# Altium PCB MH-CD42_v1.pcbdoc
Units mm, origin at the board's own origin, x right, y up, seen from the top; angles counter-clockwise.
Board outline 29.9 x 51.08 mm, 2 copper layers (Top Layer, Bottom Layer); 17 components, 12 nets, 58 pads, 30 vias.
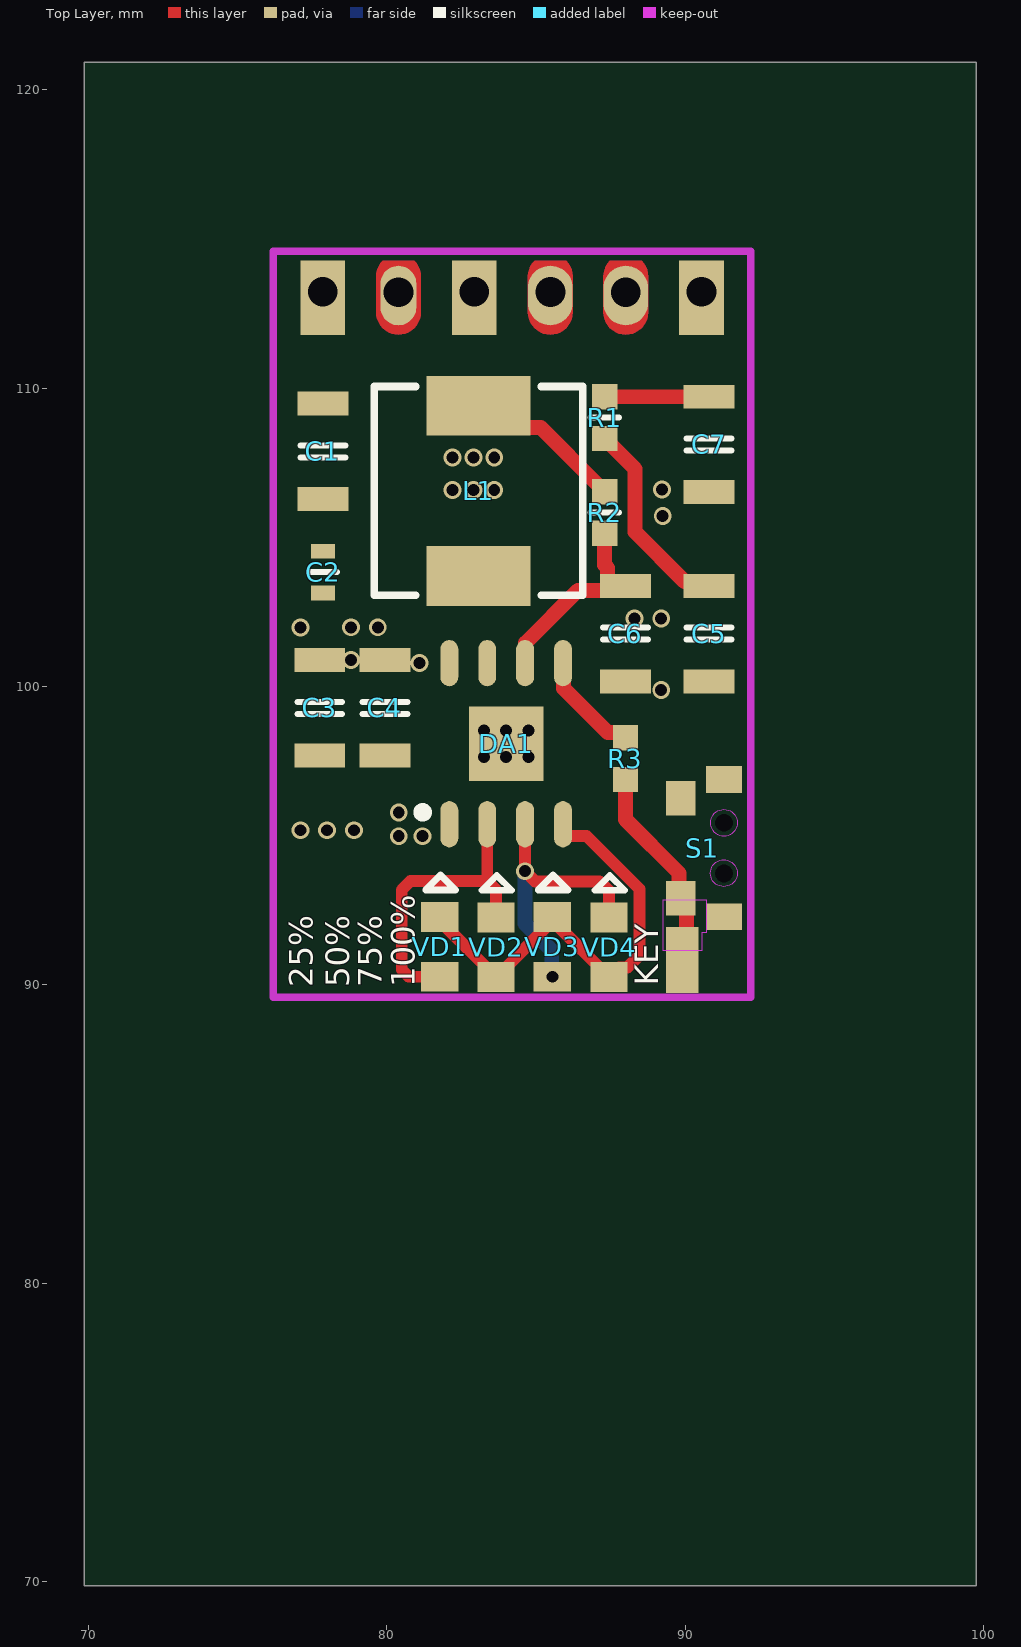
[diagram p0: Top Layer view]
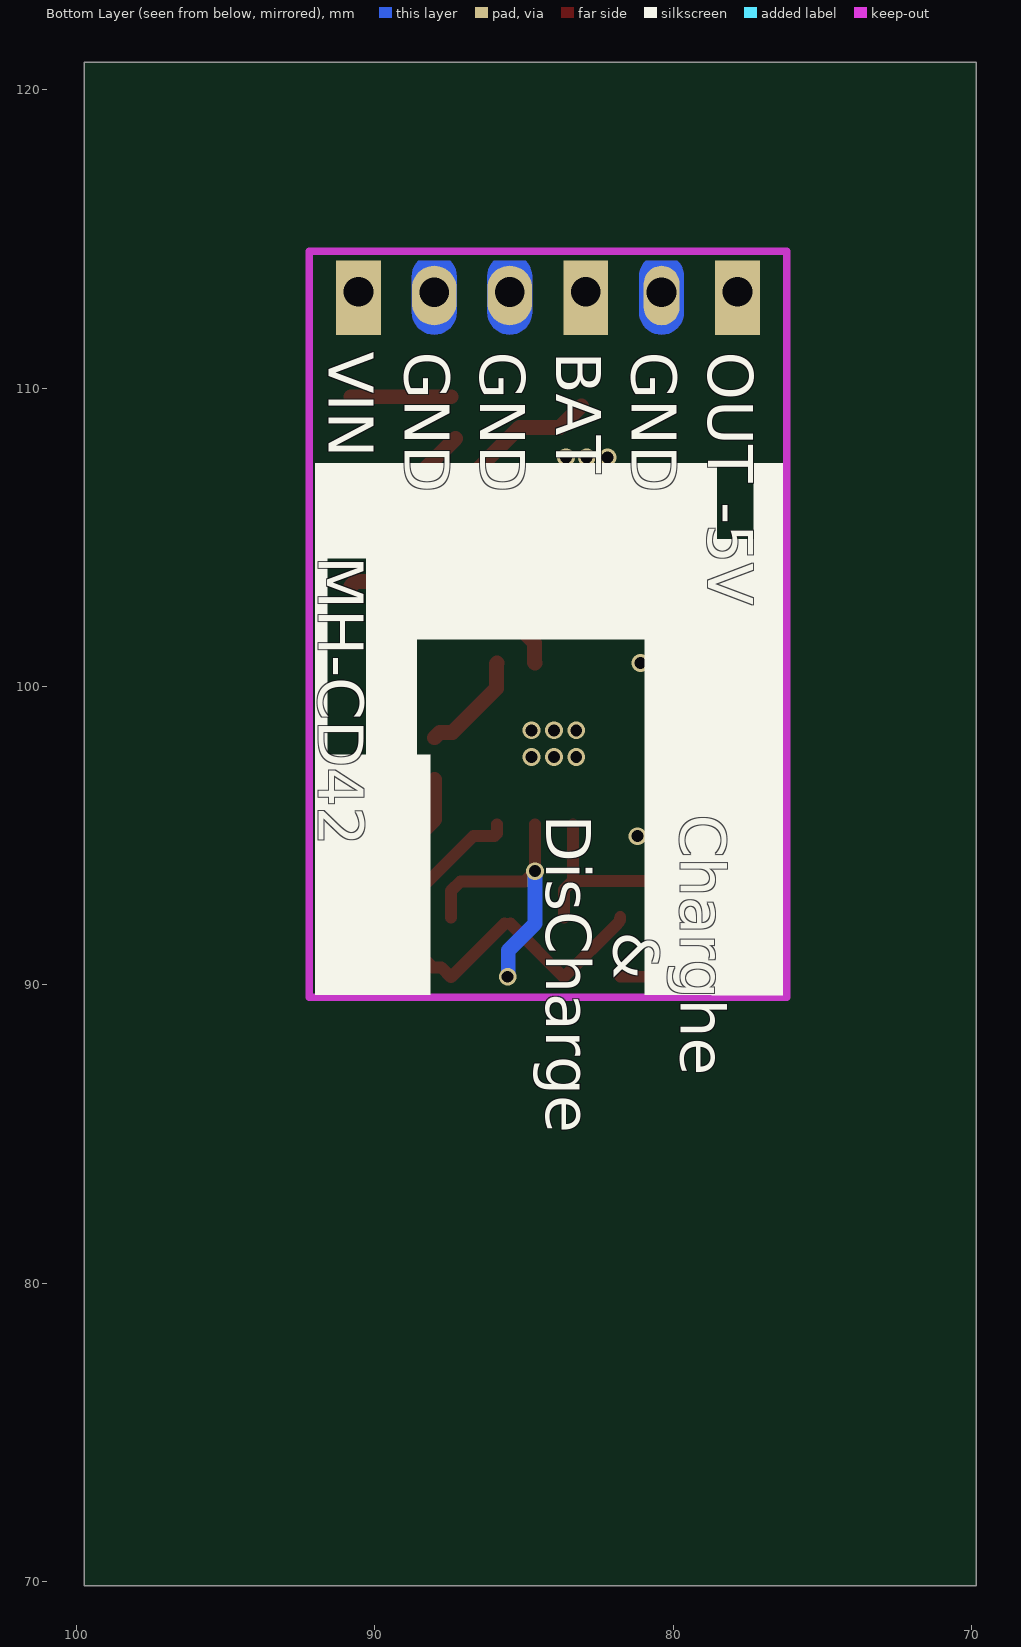
[diagram p1: Bottom Layer view, seen from below]

## Layer stack, top to bottom
Top Layer: signal copper (thickness not stored)
Dielectric: dielectric 0.32, FR-4, Dk 4.8
Bottom Layer: signal copper (thickness not stored)

## Board outline
99.75,69.85 69.85,69.85 69.85,120.932 99.75,120.932

## Design rules (kind name [scope] priority, off if disabled: settings)
BoardOutlineClearance safeClearance [All] p0: genericclearance=0.254 ignorepadtopadclearanceinfootprint=FALSE except(0: Arc-SplitContinuation Track-SplitContinuation SMDPad-SplitContinuation THPad-SplitContinuation Via-SplitContinuation Fill-SplitContinuation Poly-SplitContinuation Region-SplitContinuation Text-SplitContinuation; 0.152: Track-CutoutEdge SMDPad-CutoutEdge THPad-CutoutEdge Via-CutoutEdge Fill-CutoutEdge Region-CutoutEdge; 0.3: Track-OutlineEdge SMDPad-OutlineEdge THPad-OutlineEdge Via-OutlineEdge Fill-OutlineEdge Region-OutlineEdge Poly-OutlineEdge Text-OutlineEdge)
Clearance safeClearance [(InNet('C4') OR InNet('GLUE1') OR InNet('GLUE2') OR InNet('GLUE3') OR InNet('VD4') OR InNet('C5') OR InNet('C6') OR InNet('C7') OR InNet('DA1') OR InNet('L1') OR InNet('R2') OR InNet('VD1') OR InNet('VD2') OR InNet('C1') OR InNet('C2') OR InNet('C3') OR InNet('R1') OR InNet('R3') OR InNet('S1') OR InNet('VD3') OR InNet('GND')     or InNet('VIN') OR InNet('+VBAT') or InNet('GND') or InNet('STAT') or InNet('PROG') or InNet('VIN') OR InNet('VOUT_5V') OR InNet('VIN') OR InNet('GND') OR InNet('BAT') OR InNet('NETDA1_7') OR InNet('NETR3_1') OR InNet('LED2') OR InNet('LED3') OR InNet('NETC6_1') OR InNet('NETC5_1') OR InNet('LED1') OR InNet('NETDA1_5'))] p1: gap=0.178 ignorepadtopadclearanceinfootprint=FALSE except(0.152: Track-Track Track-SMDPad SMDPad-SMDPad Track-THPad SMDPad-THPad THPad-THPad Track-Via SMDPad-Via THPad-Via Via-Via Track-Fill SMDPad-Fill THPad-Fill Via-Fill Fill-Fill Track-Region SMDPad-Region THPad-Region Via-Region Fill-Region Region-Region Track-Poly SMDPad-Poly THPad-Poly Via-Poly Fill-Poly Region-Poly Poly-Poly Track-Text SMDPad-Text THPad-Text Via-Text Fill-Text Region-Text Poly-Text Text-Text; 0.175: Track-Hole SMDPad-Hole THPad-Hole Via-Hole Fill-Hole Region-Hole Poly-Hole Text-Hole Sheet-Hole; 0.3: Track-Sheet SMDPad-Sheet THPad-Sheet Via-Sheet Fill-Sheet Region-Sheet Poly-Sheet Text-Sheet)
DiffPairsRouting differentialPair [All] p1: maxuncoupledlength=10 minlimit=6 maxlimit=6 mostfreqgap=6 toplayer_minwidth=5 toplayer_prefwidth=10 toplayer_maxwidth=100 bottomlayer_minwidth=5 bottomlayer_prefwidth=10 bottomlayer_maxwidth=100
PasteMaskExpansion pasteMaskExpansion [All] p1: expansion=0
PlaneConnect innerPlane [All] p1: planeconnectstyle=Relief reliefexpansion=0.508 reliefentries=4 reliefconductorwidth=0.254 reliefairgap=0.254
PolygonConnect copperRegion [All] p1: connectstyle=Relief reliefentries=4 reliefconductorwidth=10 polygonreliefangle="90 Angle" airgapwidth=10
PolygonConnect copperRegion1 [All] p1: connectstyle=Direct reliefentries=4 reliefconductorwidth=10 polygonreliefangle="90 Angle" airgapwidth=10
RoutingVias viaSize [All] p1: viastyle="Through Hole" holewidth=12 minholewidth=11.8 maxholewidth=236.2 width=24 minwidth=19.7 maxwidth=393.7
SolderMaskExpansion solderMaskExpansion [All] p1: useseparateexpansions=TRUE expansion=2 expansionbottom=2
Width trackWidth [All] p1: maxlimit=100 minlimit=5 preferedwidth=10

## Components (designator, comment, footprint, x,y, rotation, side; value= is the part's Value field where it differs from the comment)
C1 "0,1uF" C1206C 77.86,107.882 r270 top
C2 "68pF" C0603C 77.862,103.832 r90 top
C3 "0,1uF" C1206C 77.75,99.282 r270 top
C4 "0,1uF" C1206C 79.936,99.282 r270 top
C5 "10uF" C1206C 90.8,101.771 r270 top
C6 "22uF" C1206C 88,101.771 r270 top
C7 "10uF" C1206C 90.8,108.113 r270 top
DA1 "IP5306_SO8" 8-SOIC-PAD 84,98.082 r90 top
L1 "Inductor_SMD_AMPLF_0630" INDUCTOR_SMD_AMPLF_0630 83.072,106.555 r270 top
R1 "Resistor film, 2R, ±5%, 0603, 0.1W, -55...+125°C" "RES: 0603" 87.3,109.013 r90 top
R2 "Resistor film, 0.5R, ±5%, 0603, 0.1W, -55...+125°C" "RES: 0603" 87.3,105.832 r90 top
R3 "Resistor film, 10k, ±5%, 0603, 0.1W, -55...+125°C" "RES: 0603" 88,97.582 r90 top
S1 "TS24CA" "BUT: TS24CA" 91.3,94.582 r270 top
VD1 "LED, Green, *, *, *, -55...+150°C" "LED: 0805G" 81.777,91.27 r90 top
VD2 "LED, Green, *, *, *, -55...+150°C" "LED: 0805G" 83.663,91.258 r90 top
VD3 "LED, Green, *, *, *, -55...+150°C" "LED: 0805G" 85.548,91.27 r90 top
VD4 "LED, Green, *, *, *, -55...+150°C" "LED: 0805G" 87.45,91.259 r90 top

## Footprints (in the part's own frame and the unit in brackets; to place one, negate y for a bottom-side part, rotate by r counter-clockwise, add the part's x,y. Pads: shape width x height; smd on the part's side, far side on the other; paste and mask are expansions set on the pad)
8-SOIC-PAD [mm]
  rrect100% 1.55x0.6 smd: 1(-2.7,1.905) 2(-2.7,0.635) 3(-2.7,-0.635) 4(-2.7,-1.905) 5(2.7,-1.905) 6(2.7,-0.635) 7(2.7,0.635) 8(2.7,1.905)
  rect 2.5x2.5 smd: " 0"(0,0)
"BUT: TS24CA" [mm]
  rect 0.9x1.2 smd: 1(-2.3,0) 2(2.3,0)
  rect 1.15x1 smd: 3(-1.675,-1.45) 4(1.675,-1.45)
  round 0.3 hole 0.6 unplated: MH1(-0.85,0) MH2(0.85,0)
C0603C [mm]
  rect 0.5x0.8 smd: 1(-0.7,0) 2(0.7,0)
C1206C [mm]
  rect 0.8x1.7 smd: 1(-1.6,0) 2(1.6,0)
  silkscreen extent -0.2,-0.6 0.2,0.6
INDUCTOR_SMD_AMPLF_0630 [mm]
  rect 2x3.5 smd: 1(-2.85,0) 2(2.85,0)
  silkscreen extent -3.5,-3.5 3.5,3.5
"LED: 0805G" [mm]
  rect 1x1.25 smd: 1(-1,0) 2(1,0)
"RES: 0603" [mm]
  rect 0.85x0.85 smd: 1(-0.7,0) 2(0.7,0)

## Free pads (board coordinates)
  rect 1.1x2.2 smd: 0(89.9,90.832)
  rect 1.5x2.5 hole 1 copper offset 0,-0.2: 1(77.85,113.232) 3(82.93,113.232) 6(90.55,113.232)
  oval 1.2x2 hole 1 copper offset 0,-0.11: 2(80.39,113.215)
  round 0.025 smd: 2(80.39,113.232) 4(85.481,113.235) 5(88.01,113.232)
  round 0.025 smd far side: 2(80.39,113.232) 4(85.481,113.235) 5(88.01,113.232)
  oval 1.5x2 hole 1 copper offset 0,-0.11: 4(85.481,113.218) 5(88.01,113.215)

## Via types
v1: diameter 0.6, hole 0.4, Top Layer to Bottom Layer, 30 vias

## Nets (pads, with @x,y where several pads share a name; then routed paths per layer and width w, separated by ;. In a path a pad name is that pad's centre, name@x,y a point inside that pad or via, vN(x,y) a via of type N, cw(c..) or ccw(c..) an arc to the next point about the centre after c; other vN are vias at no path point)
BAT: C1.1 L1.1 pad.3 R2.2 | length 5.7
  Top Layer w0.5: L1.1 83.795,108.682 85.16,108.682 87.125,106.717 87.125,106.707 87.462,106.37 R2.2@87.472,106.37
  other v1: 82.2,107.682 82.9,107.682 83.6,107.682
GND: "DA1. 0" C1.2 C2.2 C3.2 C4.2 C5.2 C6.2 C7.2 pad.2 pad.4 pad.5 S1.3
  other v1: 77.1,95.182 78,95.182 78.9,95.182 83.25,97.632 84,97.632 84.75,97.632 83.25,98.532 84,98.532 84.75,98.532 89.197,99.884 88.297,102.284 89.197,102.284 89.247,105.72 82.2,106.582 82.9,106.582 83.6,106.582 89.225,106.604
LED1: DA1.2 VD1.1 VD2.2 | length 10.3
  Top Layer w0.4: VD1.1 80.734,90.27 80.499,90.504 80.499,93.181 80.8,93.482 83.365,93.482 ; DA1.2 83.365,93.482 ; VD2.2 83.663,93.184 83.365,93.482
LED2: DA1.3 VD3.1 VD4.2 | length 9.5
  Top Layer w0.4: DA1.3 84.635,93.802 84.968,93.469 87.129,93.469 87.45,93.148 VD4.2
  Bottom Layer w0.5: v1(84.629,93.809) 84.629,92.053 85.529,91.153 85.529,90.289 v1(85.548,90.27)
LED3: DA1.4 VD1.2 VD2.1 VD3.2 VD4.1 | length 15.1
  Top Layer w0.4: VD1.2 ccw(c82.08,92.27) 81.865,92.056 VD2.1 VD3.2@85.46,92.056 ; VD3.2@85.653,92.056 VD4.1 87.775,90.584 88.067,90.584 88.467,90.984 88.467,93.215 86.7,94.982 85.997,94.982 85.905,95.074 DA1.4
NETC5_1: C5.1 R1.1 | length 6.8
  Top Layer w0.5: R1.1 88.325,107.288 88.325,105.176 89.979,103.521 90.65,103.521 C5.1
NETC6_1: C6.1 DA1.6 R2.1 | length 6.2
  Top Layer w0.5: DA1.6 84.654,100.801 84.654,101.466 86.41,103.221 87.4,103.221 C6.1@87.45,103.271 ; R2.1@87.3,104.809 87.3,104.071 87.4,103.971 87.4,103.521 87.55,103.371 C6.1
NETDA1_5: DA1.5 R3.2 | length 3.6
  Top Layer w0.5: DA1.5 85.924,100.763 85.924,99.937 87.404,98.457 87.825,98.457 R3.2
NETDA1_7: DA1.7 L1.2
NETR3_1: pad.0 R3.1 S1.4 | length 6.4
  Top Layer w0.5: R3.1 88,95.54 89.8,93.74 89.8,93.057 S1.4@90.053,92.804 ; pad.0@90.046,91.34 90.046,92.796 S1.4@90.053,92.804 ; S1.4@90.075,92.782 S1.4@90.053,92.804
VIN: C7.1 DA1.1 pad.6 R1.2 | length 3.4
  Top Layer w0.5: R1.2@87.45,109.713 C7.1
  other v1: 80.4,94.982 81.2,94.982 80.4,95.782
VOUT_5V: C2.1 C3.1 C4.1 DA1.8 pad.1
  other v1: 81.1,100.782 78.8,100.882 77.1,101.982 78.797,101.984 79.697,101.984
pads on no net: S1.1 S1.2 S1.MH1 S1.MH2

## Polygon pours and split planes (outlines as drawn)
VOUT_5V on Top Layer (solid, pour order 0): 82.085,99.885 76.427,99.885 76.427,103.382 79.62,103.382 81.341,101.661 82.051,101.661 cw(c82.051,101.211) 82.5,101.211 82.5,100.3 cw(c82.085,100.3)
GND on Bottom Layer (solid, pour order 20): 79,114.382 79,99.881 76.427,99.881 76.427,89.82 91.891,89.82 91.891,114.391 81.6,114.391
VIN on Top Layer (solid, pour order 2): 82.395,96.157 82.395,94.607 80.056,94.607 80.056,96.157
VOUT_5V on Bottom Layer (solid, pour order 22): 76.427,114.382 79,114.382 79,102.34 81.476,102.34 81.476,99.881 76.427,99.881
GND on Top Layer (solid, pour order 4): 91.891,104.061 90.451,104.061 88.933,105.579 88.933,107.534 88.218,108.249 88.218,108.982 89,108.982 91.891,108.982
VIN on Bottom Layer (solid, pour order 24): 80.056,94.482 87.706,94.482 91.9,98.676 91.9,114.391 89.696,114.391 89.696,99.657 86.521,96.482 80.056,96.482
BAT on Top Layer (solid, pour order 6): 84,107.266 84,108.882 81.888,108.882 81.888,107.266
BAT on Bottom Layer (solid, pour order 26): 84,114.382 84,110.582 84,107.282 81.888,107.282 81.888,114.382
NETDA1_7 on Top Layer (solid, pour order 8): 83.065,100.782 83.065,101.11 ccw(c82.169,101.11) 82.169,102.006 81.603,102.006 81.322,102.287 81.322,103.382 84.822,103.382 84.822,102.624 83.946,101.748 ccw(c84.624,101.07) 83.665,101.07 83.665,100.782
VIN on Top Layer (solid, pour order 10): 89.696,114.391 91.891,114.391 91.891,109.313 89.7,109.313 89.7,111.682
GND on Top Layer (solid, remove dead copper, pour order 12): 89.5,92.982 89.5,93.882 88,95.382 88,97.861 85.9,99.961 85.9,102.482 86.049,102.631 91.891,102.631 91.891,97.332 91.891,92.982 90.4,92.982
BAT on Top Layer (solid, remove dead copper, pour order 14): 77.01,109.082 77.01,110.405 81.6,110.405 81.6,109.082
GND on Top Layer (solid, pour order 16): 89.5,114.391 89.5,109.87 87.898,109.87 87.898,110.334 86.625,110.334 86.625,107.251 86.366,107.251 84.837,108.779 84.837,110.659 76.759,110.659 76.759,108.782 84.445,108.782 87.331,105.897 87.331,103.571 86.76,103.571 84.564,101.376 81.626,101.376 81.626,102.455 80.547,102.455 79.62,103.382 76.427,103.382 76.427,114.391
GND on Top Layer (solid, pour order 18): 85.4,99.582 76.427,99.582 76.427,89.82 80.5,89.82 80.5,93.482 83.246,93.482 88.2,93.482 88.7,92.982 88.7,91.444 87.814,90.559 87.814,89.82 91.891,89.82 91.891,91.983 89.7,91.983 89.7,95.282

## Keep-outs
Top Layer:
  region: 91.295,93.292 cw(c91.295,93.742) 90.845,93.742 cw(c91.295,93.742) 91.295,94.192 cw(c91.295,93.742) 91.745,93.742 cw(c91.295,93.742)
  region: 91.301,94.982 cw(c91.301,95.432) 90.851,95.432 cw(c91.301,95.432) 91.301,95.882 cw(c91.301,95.432) 91.751,95.432 cw(c91.301,95.432)
  region: 90.56,91.145 89.263,91.145 89.263,92.846 90.713,92.846 90.713,91.743 90.56,91.743
Board Outline Layer:
  lines w0.254: 76.2,89.582 76.2,114.582 92.2,114.582 92.2,89.582 76.2,89.582

## Other copper
Top Layer:
  region: 87.26,112.542 87.26,113.742 cw(c88.01,113.742) 87.48,114.272 88.54,114.272 cw(c88.01,113.742) 88.76,113.742 88.76,112.542 cw(c88.01,112.542) 88.01,111.792 cw(c88.01,112.542)
  region: 84.731,112.545 84.731,113.745 cw(c85.481,113.745) 84.951,114.276 86.011,114.276 cw(c85.481,113.745) 86.231,113.745 86.231,112.545 cw(c85.481,112.545) 85.481,111.795 cw(c85.481,112.545)
  region: 79.64,112.542 79.64,113.742 cw(c80.39,113.742) 79.86,114.272 80.92,114.272 cw(c80.39,113.742) 81.14,113.742 81.14,112.542 cw(c80.39,112.542) 80.39,111.792 cw(c80.39,112.542)
Bottom Layer:
  region: 84.731,112.545 84.731,113.745 cw(c85.481,113.745) 84.951,114.276 86.011,114.276 cw(c85.481,113.745) 86.231,113.745 86.231,112.545 cw(c85.481,112.545) 85.481,111.795 cw(c85.481,112.545)
  region: 79.64,112.542 79.64,113.742 cw(c80.39,113.742) 79.86,114.272 80.92,114.272 cw(c80.39,113.742) 81.14,113.742 81.14,112.542 cw(c80.39,112.542) 80.39,111.792 cw(c80.39,112.542)
  region: 87.26,112.542 87.26,113.742 cw(c88.01,113.742) 87.48,114.272 88.54,114.272 cw(c88.01,113.742) 88.76,113.742 88.76,112.542 cw(c88.01,112.542) 88.01,111.792 cw(c88.01,112.542)

## Silkscreen, mask and mechanical layers (free items; w line width, h text height)
Top Silkscreen Layer:
  circle w0.3: c81.2,95.782 r0.1
  circle w0.3: c81.2,95.782 r0.16
  lines w0.2: 77,99.482 78.5,99.482 ; 77.11,107.682 78.61,107.682 ; 77.11,108.082 78.61,108.082 ; 77.387,103.832 78.337,103.832 ; 79.186,99.082 80.686,99.082 ; 79.186,99.482 80.686,99.482 ; 86.825,105.832 87.775,105.832 ; 86.825,109.013 87.775,109.013 ; 87.25,101.571 88.75,101.571 ; 87.25,101.971 88.75,101.971 ; 90.05,101.571 91.55,101.571 ; 90.05,101.971 91.55,101.971 ; 90.05,107.913 91.55,107.913 ; 90.05,108.313 91.55,108.313 ; 77,99.082 78.5,99.082 77,99.082
  lines w0.225: 81.3,93.182 82.3,93.182 81.8,93.682 81.3,93.182 ; 83.186,93.17 83.686,93.67 84.186,93.17 83.186,93.17 ; 85.072,93.182 85.572,93.682 86.072,93.182 85.072,93.182 ; 86.973,93.17 87.473,93.67 87.973,93.17 86.973,93.17
  text "KEY" at 89.09,89.977 h0.8 r90
  text "25%" at 77.52,89.912 h0.8 r90
  text "50%" at 78.736,89.912 h0.8 r90
  text "75%" at 79.836,89.912 h0.8 r90
  text "100%" at 80.936,89.912 h0.8 r90
Bottom Silkscreen Layer:
  region: 91.6,104.882 92,104.882 92,97.648 91.6,97.648
  region: 76.7,97.882 78.4,97.882 78.4,89.719 76.7,89.719
  region: 76.331,104.482 78.711,104.482 78.711,89.659 76.331,89.659
  region: 77.2,104.932 78.689,104.932 78.689,104.318 77.2,104.318
  region: 78.681,105.982 90.187,105.982 90.187,101.582 78.681,101.582
  region: 76.331,107.478 77.3,107.478 77.3,104.382 76.331,104.382
  region: 78.547,107.478 92,107.478 92,104.37 78.547,104.37
  region: 78.571,104.583 80.946,104.583 80.946,89.659 78.571,89.659
  region: 88.597,104.568 90.297,104.568 90.297,96.405 88.597,96.405
  region: 83.648,104.306 83.648,106.006 91.811,106.006 91.811,104.306
  region: 88.145,97.712 92,97.712 92,89.659 88.145,89.659
  text "OUT -5V" at 78.832,111.228 h1.5 r90
  text "GND" at 81.383,111.228 h1.5 r90
  text "BAT" at 83.923,111.228 h1.5 r90
  text "GND" at 86.463,111.228 h1.5 r90
  text "GND" at 89.003,111.228 h1.5 r90
  text "VIN" at 91.554,111.228 h1.5 r90
  text "MH-CD42" at 91.89,104.359 h1.5 r90
  text "Charghe /       & / DisCharge" at 84.25,95.7 h1.5 r90
Top Paste Mask Layer:
  region: 87.26,112.542 87.26,113.742 cw(c88.01,113.742) 87.48,114.272 88.54,114.272 cw(c88.01,113.742) 88.76,113.742 88.76,112.542 cw(c88.01,112.542) 88.01,111.792 cw(c88.01,112.542)
  region: 84.731,112.545 84.731,113.745 cw(c85.481,113.745) 84.951,114.276 86.011,114.276 cw(c85.481,113.745) 86.231,113.745 86.231,112.545 cw(c85.481,112.545) 85.481,111.795 cw(c85.481,112.545)
  region: 79.64,112.542 79.64,113.742 cw(c80.39,113.742) 79.86,114.272 80.92,114.272 cw(c80.39,113.742) 81.14,113.742 81.14,112.542 cw(c80.39,112.542) 80.39,111.792 cw(c80.39,112.542)
Bottom Paste Mask Layer:
  region: 87.26,112.542 87.26,113.742 cw(c88.01,113.742) 87.48,114.272 88.54,114.272 cw(c88.01,113.742) 88.76,113.742 88.76,112.542 cw(c88.01,112.542) 88.01,111.792 cw(c88.01,112.542)
  region: 84.731,112.545 84.731,113.745 cw(c85.481,113.745) 84.951,114.276 86.011,114.276 cw(c85.481,113.745) 86.231,113.745 86.231,112.545 cw(c85.481,112.545) 85.481,111.795 cw(c85.481,112.545)
  region: 79.64,112.542 79.64,113.742 cw(c80.39,113.742) 79.86,114.272 80.92,114.272 cw(c80.39,113.742) 81.14,113.742 81.14,112.542 cw(c80.39,112.542) 80.39,111.792 cw(c80.39,112.542)
Top Solder Mask Layer:
  region: 88.01,111.69 cw(c88.01,112.542) 87.158,112.542 87.158,113.742 cw(c88.01,113.742) 87.408,114.344 cw(c87.48,114.272) 87.48,114.374 88.54,114.374 cw(c88.54,114.272) 88.612,114.344 cw(c88.01,113.742) 88.862,113.742 88.862,112.542 cw(c88.01,112.542)
  region: 85.481,111.694 cw(c85.481,112.545) 84.63,112.545 84.63,113.745 cw(c85.481,113.745) 84.879,114.347 cw(c84.951,114.276) 84.951,114.377 86.011,114.377 cw(c86.011,114.276) 86.083,114.347 cw(c85.481,113.745) 86.333,113.745 86.333,112.545 cw(c85.481,112.545)
  region: 80.39,111.69 cw(c80.39,112.542) 79.538,112.542 79.538,113.742 cw(c80.39,113.742) 79.788,114.344 cw(c79.86,114.272) 79.86,114.374 80.92,114.374 cw(c80.92,114.272) 80.992,114.344 cw(c80.39,113.742) 81.242,113.742 81.242,112.542 cw(c80.39,112.542)
Bottom Solder Mask Layer:
  region: 88.01,111.69 cw(c88.01,112.542) 87.158,112.542 87.158,113.742 cw(c88.01,113.742) 87.408,114.344 cw(c87.48,114.272) 87.48,114.374 88.54,114.374 cw(c88.54,114.272) 88.612,114.344 cw(c88.01,113.742) 88.862,113.742 88.862,112.542 cw(c88.01,112.542)
  region: 85.481,111.694 cw(c85.481,112.545) 84.63,112.545 84.63,113.745 cw(c85.481,113.745) 84.879,114.347 cw(c84.951,114.276) 84.951,114.377 86.011,114.377 cw(c86.011,114.276) 86.083,114.347 cw(c85.481,113.745) 86.333,113.745 86.333,112.545 cw(c85.481,112.545)
  region: 80.39,111.69 cw(c80.39,112.542) 79.538,112.542 79.538,113.742 cw(c80.39,113.742) 79.788,114.344 cw(c79.86,114.272) 79.86,114.374 80.92,114.374 cw(c80.92,114.272) 80.992,114.344 cw(c80.39,113.742) 81.242,113.742 81.242,112.542 cw(c80.39,112.542)
Mech5:
  lines w0.25: 76.2,89.582 92.2,89.582 92.2,114.582 76.2,114.582 76.2,89.582